# Altium PCB One_Layer_Driver_ PCB.PcbDoc
Units mil, origin at the board's own origin, x right, y up, seen from the top; angles counter-clockwise.
Board outline 3937.01 x 2519.67 mil, 2 copper layers (Top Layer, Bottom Side); 57 components, 41 nets, 147 pads, 30 vias.
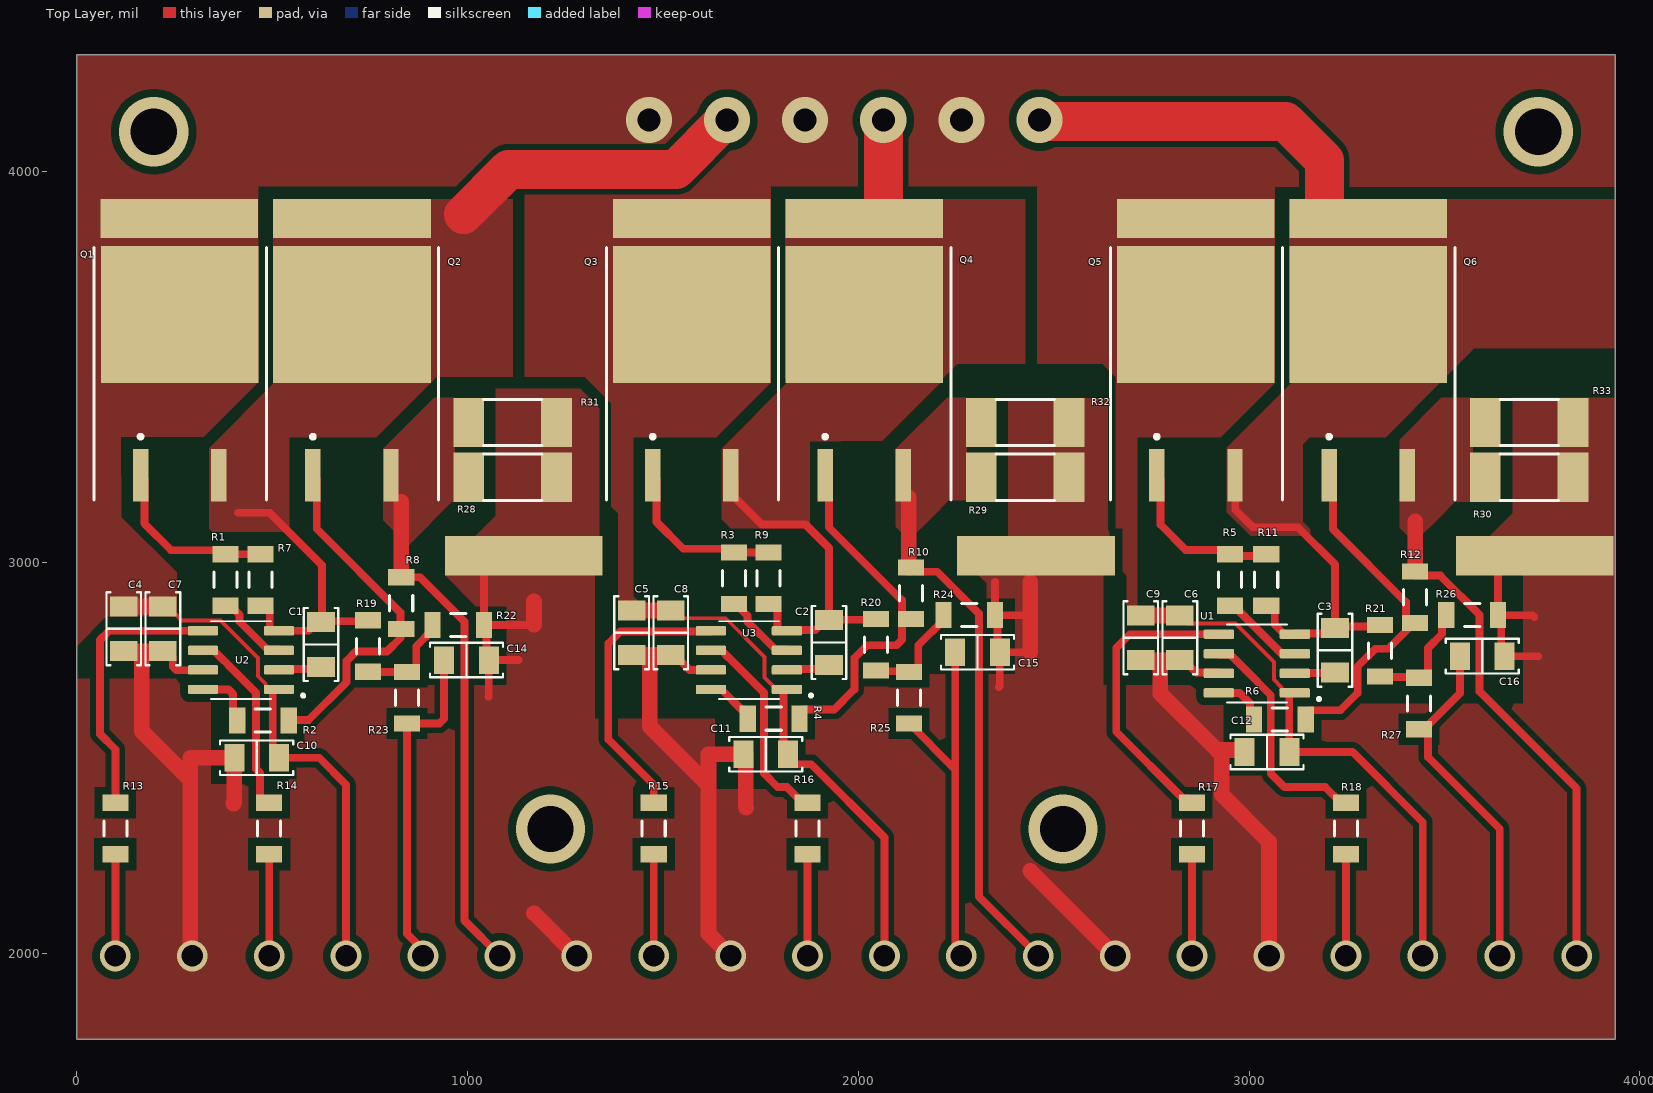
[diagram p0: Top Layer view]
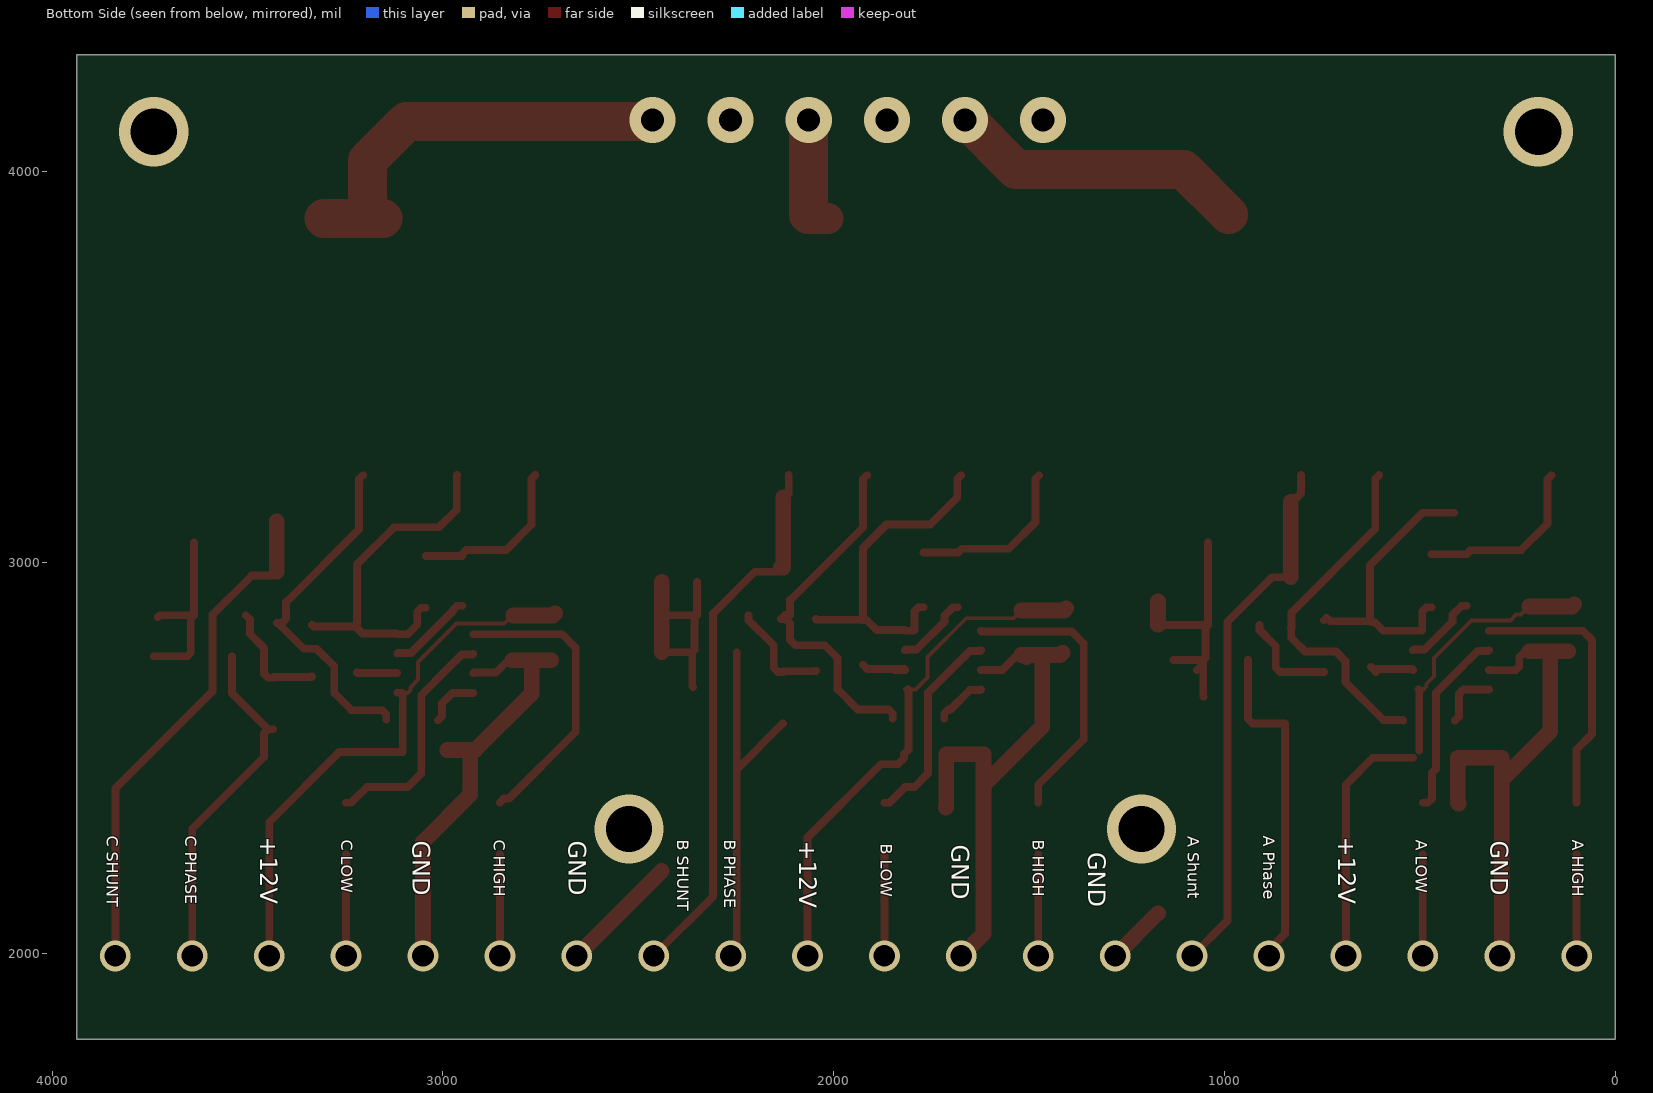
[diagram p1: Bottom Side view, seen from below]
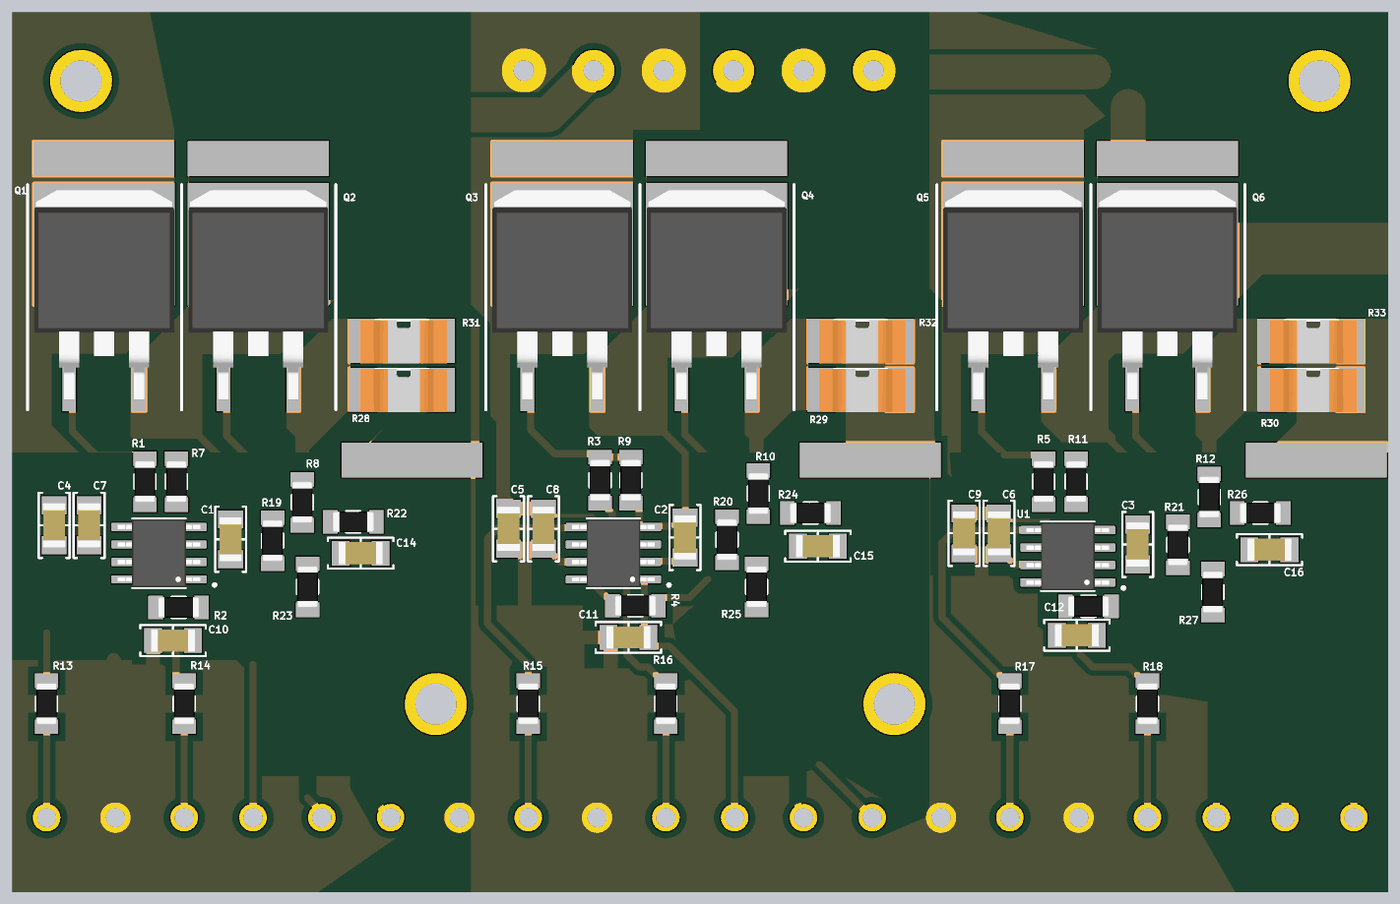
[diagram p2: 3D render of the assembled board from above, using the file's embedded part models]

## Layer stack, top to bottom
Top Solder: solder mask 0.4, Solder Resist, Dk 3.5
Top Layer: signal copper 1.378
Dielectric 1: dielectric 12.6, FR-4, Dk 4.8
Bottom Side: signal copper (thickness not stored)

## Board outline
0,1779.33 0,4299 3937.01,4299 3937.01,1779.33

## Design rules (kind name [scope] priority, off if disabled: settings)
AssemblyTestpoint [All] p1: testpointundercomponent=TRUE minsize=40 maxsize=120 preferedsize=60 minholesize=0 maxholesize=120 preferedholesize=32 testpointgrid=1 usegrid=TRUE gridtolerance=0.01 allowsidetop=TRUE allowsidebottom=TRUE
Clearance [All] p1: gap=10 ignorepadtopadclearanceinfootprint=FALSE except(3: Arc-Text Track-Text SMDPad-Text THPad-Text Via-Text Fill-Text Region-Text Text-Text Text-Hole; 15: Track-Poly; 20: Arc-Poly SMDPad-Poly THPad-Poly Via-Poly Fill-Poly Poly-Poly Poly-Region Poly-Text Poly-Hole)
DiffPairsRouting [All] p1: maxlimit=10 minlimit=10 mostfreqgap=10 substack1={77332796-445B-4B3C-BE02-87E5A48E286C} toplayer_{77332796-445b-4b3c-be02-87e5a48e286c}_minwidth=15 toplayer_{77332796-445b-4b3c-be02-87e5a48e286c}_maxwidth=15 toplayer_{77332796-445b-4b3c-be02-87e5a48e286c}_prefwidth=15 bottomlayer_{77332796-445b-4b3c-be02-87e5a48e286c}_minwidth=15 bottomlayer_{77332796-445b-4b3c-be02-87e5a48e286c}_maxwidth=15 bottomlayer_{77332796-445b-4b3c-be02-87e5a48e286c}_prefwidth=15 toplayer_minwidth=15 toplayer_maxwidth=15 toplayer_prefwidth=15 bottomlayer_minwidth=15 bottomlayer_maxwidth=15 bottomlayer_prefwidth=15 maxuncoupledlength=500
HoleSize [All] p1: absolutevalues=TRUE maxlimit=200 minlimit=1 maxpercent=80.000 minpercent=20.000
PlaneConnect [All] p1: pad.planeconnectstyle=Direct pad.reliefexpansion=20 pad.reliefentries=4 pad.reliefconductorwidth=10 pad.reliefairgap=10 via.planeconnectstyle=Relief via.reliefexpansion=20 via.reliefentries=4 via.reliefconductorwidth=10 via.reliefairgap=10
PolygonConnect [All] p1: connectstyle=Direct reliefconductorwidth=10 reliefentries=4 polygonreliefangle="90 Angle" airgapwidth=10
PolygonConnect PolygonConnect_1 [All] p2: connectstyle=Relief reliefconductorwidth=10 reliefentries=4 polygonreliefangle="90 Angle" airgapwidth=10
RoutingTopology [All] p1: topology=Daisy_Balanced
RoutingVias [All] p1: holewidth=40 width=60 viastyle="Through Hole" minholewidth=28 minwidth=50 maxholewidth=40 maxwidth=80
SilkToSilkClearance [All] p1: silktosilkclearance=3
SolderMaskExpansion [All] p1: expansion=4 istentingtop=FALSE
SupplyNets "Schematic Supply Nets_3" [InNet('+12V')] p1: voltage=0.000
SupplyNets "Schematic Supply Nets" [InNet('GND')] p2: voltage=0.000
UnRoutedNet UnRoutedNet_1 [(InNet('+12V') OR InNet('GND'))] p1 off:
UnRoutedNet [All] p2 off:
Width [All] p1: maxlimit=150 minlimit=15 preferedwidth=20 substack1={77332796-445B-4B3C-BE02-87E5A48E286C} toplayer_{77332796-445b-4b3c-be02-87e5a48e286c}_minwidth=10 toplayer_{77332796-445b-4b3c-be02-87e5a48e286c}_maxwidth=200 bottomlayer_{77332796-445b-4b3c-be02-87e5a48e286c}_minwidth=10 bottomlayer_{77332796-445b-4b3c-be02-87e5a48e286c}_maxwidth=10 bottomlayer_{77332796-445b-4b3c-be02-87e5a48e286c}_prefwidth=10 minimp=50.000000 maximp=50.000000 favimp=50.000000
23 further rules are at their usual default settings.

## Components (designator, comment, footprint, x,y, rotation, side; value= is the part's Value field where it differs from the comment)
C1 "0.1uF" "CAP 1206/3216" 625,2790 r270 top
C2 "0.1uF" "CAP 1206/3216" 1925,2795 r270 top
C3 "0.1uF" "CAP 1206/3216" 3220,2775 r270 top
C4 "10uF" "CAP 1206/3216" 120,2830 r270 top
C5 "10uF" "CAP 1206/3216" 1420,2820 r270 top
C6 "10uF" "CAP 1206/3216" 2823,2807.09 r270 top
C7 "1uF" "CAP 1206/3216" 220,2830 r270 top
C8 "1uF" "CAP 1206/3216" 1520,2820 r270 top
C9 "1uF" "CAP 1206/3216" 2723,2807.09 r270 top
C10 "1uF" "CAP 1206/3216" 460,2500 r180 top
C11 "1uF" "CAP 1206/3216" 1763.09,2509 r180 top
C12 "1uF" "CAP 1206/3216" 3046,2515 r180 top
C14 "4.7nF" "CAP 1206/3216" 997.09,2750 r0 top
C15 "4.7nF" "CAP 1206/3216" 2305,2770 r0 top
C16 "4.7nF" "CAP 1206/3216" 3597.09,2760 r0 top
Q1 "SQM70060EL" TO-263 263,3429 r0 top value=IRF4905S
Q2 "SQM70060EL" TO-263 704,3429 r0 top value=IRF4905S
Q3 "SQM70060EL" TO-263 1574,3429 r0 top value=IRF4905S
Q4 "SQM70060EL" TO-263 2015,3429 r0 top value=IRF4905S
Q5 "SQM70060EL" TO-263 2864,3429 r0 top value=IRF4905S
Q6 "SQM70060EL" TO-263 3305,3429 r0 top value=IRF4905S
R1 "36R" "RES 1206 (3216X08L)" 380,2904 r90 top
R2 "36R" "RES 1206 (3216X08L)" 425.11,2595 r0 top
R3 "36R" "RES 1206 (3216X08L)" 1682,2908 r90 top
R4 "36R" "RES 1206 (3216X08L)" 1732,2600 r0 top
R5 "36R" "RES 1206 (3216X08L)" 2951,2904 r90 top
R6 "36R" "RES 1206 (3216X08L)" 3028,2598 r0 top
R7 "10k" "RES 1206 (3216X08L)" 470,2904 r90 top
R8 "10k" "RES 1206 (3216X08L)" 830,2947.05 r270 top
R9 "10k" "RES 1206 (3216X08L)" 1770,2908 r90 top
R10 "10k" "RES 1206 (3216X08L)" 2135,2972.05 r270 top
R11 "10k" "RES 1206 (3216X08L)" 3044,2904 r90 top
R12 "10k" "RES 1206 (3216X08L)" 3425,2962.05 r270 top
R13 "36R" "RES 1206 (3216X08L)" 98.43,2370.08 r270 top
R14 "36R" "RES 1206 (3216X08L)" 492.13,2370.08 r270 top
R15 "36R" "RES 1206 (3216X08L)" 1476.38,2370.08 r270 top
R16 "36R" "RES 1206 (3216X08L)" 1870.08,2370.08 r270 top
R17 "36R" "RES 1206 (3216X08L)" 2854.33,2370.08 r270 top
R18 "36R" "RES 1206 (3216X08L)" 3248.03,2370.08 r270 top
R19 "100k" "RES 1206 (3216X08L)" 745,2837.05 r270 top
R20 "100k" "RES 1206 (3216X08L)" 2045,2840 r270 top
R21 "100k" "RES 1206 (3216X08L)" 3335,2825 r270 top
R22 "10k" "RES 1206 (3216X08L)" 1027.05,2840 r180 top
R23 "1k" "RES 1206 (3216X08L)" 845,2705 r270 top
R24 "10k" "RES 1206 (3216X08L)" 2335,2865 r180 top
R25 "1k" "RES 1206 (3216X08L)" 2130,2705 r270 top
R26 "10k" "RES 1206 (3216X08L)" 3622.05,2865 r180 top
R27 "1k" "RES 1206 (3216X08L)" 3435,2690 r270 top
R28 "10mR 2512 2.5W" Shunt_2512 1115.2,3218 r180 top
R29 "10mR 2512 2.5W" Shunt_2512 2427,3218 r180 top
R30 "10mR 2512 2.5W" Shunt_2512 3717,3218 r180 top
R31 "10mR 2512 2.5W" Shunt_2512 1115.2,3358 r180 top
R32 "10mR 2512 2.5W" Shunt_2512 2427,3358 r180 top
R33 "10mR 2512 2.5W" Shunt_2512 3717,3358 r180 top
U1 "UCC27201ADR" SOIC127P599X175-8N 3020,2741.21 r180 top
U2 "UCC27201ADR" SOIC127P599X175-8N 420,2750 r180 top
U3 "UCC27201ADR" SOIC127P599X175-8N 1720,2750 r180 top

## Footprints (in the part's own frame and the unit in brackets; to place one, negate y for a bottom-side part, rotate by r counter-clockwise, add the part's x,y. Pads: shape width x height; smd on the part's side, far side on the other; paste and mask are expansions set on the pad)
"CAP 1206/3216" [mm] "Chip Capacitor, 2-Leads, Body 3.25x1.60mm, IPC Medium Density"
  rect 1.3x1.8 smd: 1(-1.45,0) 2(1.45,0)
  silkscreen extent -2.37,-1.13 2.37,1.13, body extent -1.6,-0.81 1.6,0.81, height 1.62
"RES 1206 (3216X08L)" [mm] "Chip Resistor, 2-Leads, Body 3.2x1.6mm, IPC High Density _ (0.125 W)"
  rect 1.05x1.7 smd: 1(-0.377,0) 2(2.973,0)
  silkscreen extent 0.8,-0.75 1.8,0.75, body extent -0.23,-0.76 2.82,0.76, height 0.6
Shunt_2512 [mm] "Chip Resistor, 2-Leads, Body 6.3x3.1mm, IPC High Density _ (0.500 W)"
  rect 2x3.2 smd: 1(-2.85,0) 2(2.85,0)
  silkscreen extent -1.9,-1.5 1.9,1.5, body extent -3.28,-1.52 3.02,1.63, height 1.12
SOIC127P599X175-8N [mm]
  rrect25% 1.97x0.6 smd paste+0 mask+0.102: 1(-2.47,1.905) 2(-2.47,0.635) 3(-2.47,-0.635) 4(-2.47,-1.905) 5(2.47,-1.905) 6(2.47,-0.635) 7(2.47,0.635) 8(2.47,1.905)
  silkscreen extent -4.14,-2.53 1.95,2.53, body extent -3,-2.45 3,2.45, height 1.75
TO-263 [mm] "L7800CD2T _ D2-PAK/TO-263-AB; 3 Leads (1 Cropped); Body 15.9 (inc. leads) x 10.4 mm (LxW max)"
  rect 1x3.4 smd: 1(-2.54,-5.225) 3(2.54,-5.225)
  rect 10.25x8.9 smd: 4(0,5.225)
  silkscreen extent -5.56,-6.83 5.64,9.57, body extent -5.08,-6.11 5.08,9.16, height 4.88

## Part data
C1 C2 C3 C4 C5 C6 C7 C8 C9 C10 C11 C12 C14 C15 C16: library part Cap_Multi_SMD, "Bipolar ceramic capacitor SMD", Package=Package?, Rating=50V, Type=Type?, Validation=Valid, Inflow=inflow?
Q1 Q2 Q3 Q4 Q5 Q6: library part Semi_MOSFET_IRF4905S, "P-Channel MOSFET", Package=TO-263, Rating=Rating?, Type=P-Channel, Validation=Valid
  Q1 Q2 Q3 Q4 Q5: SQM70060EL=SQM70060EL
  Q6: Inflow=SQM70060EL
R1 R2 R3 R4 R5 R6 R7 R8 R9 R10 R11 R12 R13 R14 R15 R16 R17 R18 R19 R20 R21 R22 R23 R24 R25 R26 R27: library part Res_SMD_1206, "Resistor", Package=1206, Rating=0.25W, Type=10%, Validation=Valid, Inflow=inflow?
R28 R29 R30 R31 R32 R33: library part Res_Shunt_SMD, "Resistor", Package=Package?, Rating=Precision, Type=Shunt, Validation=NT, Inflow=inflow?
U1 U2 U3: "3-A, 120-V half bridge gate driver with 8-V UVLO and negative voltage handling", Package="SOIC-8 Texas Instruments", Check_prices=https://www.snapeda.com/parts/UCC27201ADR/Texas+Instruments/view-part/?ref=eda, MF="Texas Instruments", MP=UCC27201ADR, SnapEDA_Link=https://www.snapeda.com/parts/UCC27201ADR/Texas+Instruments/view-part/?ref=snap

## Free pads (board coordinates)
  rect 403.54x100 smd: 3(3731,3017) 5(262,3880) 5(704,3880) 5(1144,3017) 5(1574,3880) 5(2015,3880) 5(2455,3017) 5(2864,3880) 5(3305,3880)

## Via types
v1: diameter 78.74, hole 55.12, Top Layer to Bottom Side, 20 vias
v2: diameter 118.11, hole 59.06, Top Layer to Bottom Side, 6 vias
v3: diameter 177.17, hole 118.11, Top Layer to Bottom Side, 4 vias

## Nets (pads, with @x,y where several pads share a name; then routed paths per layer and width w, separated by ;. In a path a pad name is that pad's centre, name@x,y a point inside that pad or via, vN(x,y) a via of type N, cw(c..) or ccw(c..) an arc to the next point about the centre after c; other vN are vias at no path point)
+12V: C4.1 C5.1 C6.1 C7.1 C8.1 C9.1 C10.1 C11.1 C12.1 pad.5@262,3880 pad.5@1574,3880 pad.5@2864,3880 Q1.4 Q3.4 Q5.4 U1.1 U2.1 U3.1 | length 4086
  Top Layer w10: C7.1 240.59,2866.5 253.32,2866.5 268.01,2851.81 367.19,2851.81 463.46,2755.54 463.46,2708.71 483.46,2688.71 483.46,2681.81 490.28,2675 U2.1@503.3,2675 ; C8.1 1540.09,2857 1660.83,2857 1760,2757.83 1760,2705.28 1790.28,2675 1810.19,2675 U3.1 ; C6.1 2843.17,2844 2965.04,2844 3063.46,2745.58 3063.46,2699.92 3083.46,2679.92 3083.46,2673.02 3090.28,2666.21 U1.1@3103.09,2666.21
  Top Layer w20: C10.1@501.5,2518.5 501.5,2537.14 501.49,2673.19 U2.1@503.3,2675 ; C10.1 620,2500 688.98,2431.02 v1(688.98,1992.91) ; U3.1@1810.19,2675 1808.38,2673.19 1808.38,2520.79 C11.1 1820.17,2499.16 1835.76,2483.57 1879.43,2483.57 2066.93,2296.07 v1(2066.93,1992.91) ; U1.1 3104.9,2666.21 3103.09,2664.4 C12.1 3265,2515 3444.88,2335.12 v1(3444.88,1992.91)
  Top Layer w40: C4.1@104.57,2892.68 110.16,2887.09 C4.1 C7.1 ; C5.1@1404.57,2882.68 1410.16,2877.09 C5.1 C8.1 ; C9.1@2713.16,2869.76 2718.75,2864.17 C9.1 C6.1@2820,2864.17
  other v2: 1464,4132 1864,4132 2264,4132
"A HIGH": R13.1 U2.5 | length 706.2
  Top Layer w20: R13.1 98.43,2521.57 59,2561 59,2801.22 82.78,2825 U2.5
"A LOW": R14.1 U2.6 | length 483.6
  Top Layer w20: U2.6 324.57,2773.19 351.54,2773.19 367.91,2756.81 368.09,2756.81 389.72,2735.18 389.72,2735 458.46,2666.26 458.46,2471.54 468.66,2461.34 468.66,2395.59 479.33,2384.92 R14.1
"A SHUNT": Q2.3 R8.1 R28.2 R31.2 | length 1377
  Top Layer w20: Q2.3@804,3223.58 Q2.3 804,3176.05 813.69,3166.36 818.28,3166.36 830,3154.65 ; R8.1 878.11,2961.89 992,2848 992,2083.59 v1(1082.68,1992.91)
  Top Layer w40: R8.1 830,3154.65
"B HIGH": R15.1 U3.5 | length 731.8
  Top Layer w20: R15.1 1476.38,2430.62 1360,2547 1360,2792.22 1390.97,2823.19 1620.94,2823.19 U3.5
"B LOW": R16.1 U3.6 | length 529.8
  Top Layer w20: U3.6 1624.57,2773.19 1651.54,2773.19 1667.91,2756.81 1668.09,2756.81 1758.46,2666.44 1758.46,2460.07 1793.61,2424.92 1817.28,2424.92 1857.28,2384.92 R16.1
"B SHUNT": Q4.3 R10.1 R29.2 R32.2 | length 1411.2
  Top Layer w20: Q4.3@2115,3223.58 Q4.3 2115,3176.34 Q4.3@2129,3166.18 ; R10.1 2145.67,2976.22 2201.78,2976.22 2309,2869 2309,2144.54 v1(2460.63,1992.91)
  Top Layer w40: Q4.3@2129,3166.18 2129,2987.56 2129.67,2986.89 R10.1
"C HIGH": R17.1 U1.5 | length 761.4
  Top Layer w20: R17.1 2843.66,2395.59 2830.87,2395.59 2660,2566.46 2660,2780.94 2695.15,2816.08 2922.63,2816.08 U1.5
"C LOW": R18.1 U1.6 | length 600.7
  Top Layer w20: U1.6 2924.57,2764.4 2951.54,2764.4 2967.91,2748.02 2968.09,2748.02 2989.72,2726.39 2989.72,2726.21 3055.83,2660.11 3055.83,2459.75 3090.66,2424.91 3195.24,2424.91 3235.24,2384.92 R18.1
"C SHUNT": Q6.3 R12.1 R30.2 R33.2 | length 1315.3
  Top Layer w20: R12.1 3435.67,2966.22 3489.78,2966.22 3590,2866 3590,2670 3838.58,2421.42 v1(3838.58,1992.91)
  Top Layer w40: R12.1 3425,3105.22
GND: C4.2 C5.2 C6.2 C7.2 C8.2 C9.2 C10.2 C11.2 C12.2 C14.2 C15.2 C16.2 pad.3 pad.5@1144,3017 pad.5@2455,3017 R22.1 R24.1 R26.1 R28.1 R29.1 R30.1 R31.1 R32.1 R33.1 U1.7 U2.7 U3.7 | length 6160.3
  Top Layer w20: C7.2 229.84,2772.91 245.43,2757.32 245.43,2733.71 255.15,2724 321.76,2724 U2.7 ; pad.5@1041.89,3051 R22.1 ; 1053,2656 1054.17,2657.17 C14.2@1054.17,2740.16 ; C14.2@1069.76,2724.57 C14.2@1054.17,2740.16 ; 1130,2750 C14.2 ; 1170,2840 R22.1 ; C8.2@1529.84,2762.91 1567.76,2725 U3.7 ; 2350,2950 2349.84,2949.84 R24.1 ; 2360,2681 2362.09,2683.09 C15.2 ; 2440,2770 C15.2 ; 2440,2870 2435,2865 R24.1 ; C6.2 2832.84,2750 2864.82,2718.02 2920.95,2718.02 U1.7 ; C12.2 C12.2@2988.91,2519.92 ; pad.3@3636.89,3051 R26.1 ; 3730,2860 3725,2865 R26.1 ; 3740,2760 C16.2 3645.53,2768.64 3645.53,2856.36 R26.1 ; R22.1 1048.03,2833.86 1048.03,2756.14 C14.2 ; C14.2@1054.17,2740.16 C14.2 ; R24.1 2355.96,2858.88 2355.96,2776.12 C15.2
  Top Layer w40: C4.2 166.09,2772.91 ; C7.2 166.09,2772.91 ; v1(295.28,1992.91) 290,1998.19 290,2444 ; 401,2383 402.91,2384.91 C10.2 290,2500 290,2444 ; 1170,2102.44 v1(1279.53,1992.91) ; 1170,2840 1170,2900 ; C5.2@1414.41,2768.5 C5.2 1466.55,2762.91 ; C8.2@1507.5,2757.32 C8.2@1513.09,2762.91 ; C8.2 C8.2@1513.09,2762.91 ; v1(1673.23,1992.91) 1616.57,2049.57 1616.57,2429.48 ; 1713,2372 1711.91,2373.09 1711.91,2509 C11.2 1616.57,2509 1616.57,2429.48 ; 2440,2210.39 v1(2657.48,1992.91) ; 2440,2770 2440,2870 2440,2950 ; C9.2 2773,2750 ; C6.2 2773,2750 ; C12.2@2988.91,2519.92 2930,2519.92 ; v1(3051.18,1992.91) 3051.18,2284.63 2930,2405.81 2930,2519.92 ; 166.09,2772.91 166.09,2567.91 290,2444 ; 1466.55,2762.91 1466.55,2579.5 1616.57,2429.48 ; 1466.55,2762.91 C8.2@1513.09,2762.91 ; 2773,2750 2773,2664.64 2917.72,2519.92 2930,2519.92
NetC1_2: C1.2 U2.2 | length 148.2
  Top Layer w20: U2.2 U2.2@519.05,2726.81 ; U2.2@546.2,2726.81 U2.2@519.06,2726.81 ; C1.2@611.81,2719.72 C1.2@618.9,2726.81 ; C1.2 C1.2@618.9,2726.81 ; U2.2@519.05,2726.81 C1.2@618.9,2726.81
NetC2_2: C2.2 U3.2 | length 140.1
  Top Layer w20: U3.2@1844.21,2725 U3.2 1819.06,2726.81 1913.9,2726.81 C2.2
NetC3_2: C3.2 U1.2 | length 130.4
  Top Layer w20: U1.2@3144.21,2716.21 U1.2 3118.09,2717.06 3219.15,2717.06 C3.2
NetC14_1: C14.1 R23.2 | length 861.9
  Top Layer w20: v1(885.83,1992.91) 885.83,2008.81 845,2049.64 R23.2 927.95,2587.95 940,2600 C14.1
NetC15_1: C15.1 R25.2 | length 953.7
  Top Layer w20: R25.2 2244.41,2473.54 ; v1@2247.91,1994 C15.1 ; v1@2252.54,2004.15 v1(2263.78,1992.91)
NetC16_1: C16.1 R27.2 | length 898.4
  Top Layer w20: R27.2 R27.2@3447.8,2572.95 ; C16.1 3540,2665.16 R27.2@3447.8,2572.95 ; v1(3641.73,1992.91) 3641.73,2318.27 3458.46,2501.54 3458.46,2562.28 R27.2@3447.8,2572.95
NetJ3_5: R18.2 | length 260.1
  Top Layer w20: v1(3248.03,1992.91) R18.2
NetJ3_6: R17.2 | length 260.1
  Top Layer w20: v1(2854.33,1992.91) R17.2
NetJ3_11: R16.2 | length 260.1
  Top Layer w20: v1(1870.08,1992.91) R16.2
NetJ3_12: R15.2 | length 260.1
  Top Layer w20: v1(1476.38,1992.91) R15.2
NetJ3_17: R14.2 | length 260.1
  Top Layer w20: v1(492.13,1992.91) R14.2
NetJ3_18: R13.2 | length 260.1
  Top Layer w20: v1(98.43,1992.91) R13.2
NetQ1_1: Q1.1 R1.2 R7.2 | length 457.6
  Top Layer w20: Q1.1 172.69,3213.61 172.69,3099.46 241.15,3031 370.05,3031 R1.2 R7.2
NetQ2_1: Q2.1 R2.2 R8.2 | length 916.6
  Top Layer w20: R2.2 544.16,2597 593.3,2597 690,2693.7 690,2747.42 714.58,2772 793.85,2772 829,2807.15 829,2829 R8.2 828,2832 828,2872 613.69,3086.31 613.69,3213.9 Q2.1@604,3223.58
NetQ3_1: Q3.1 R3.2 R9.2 | length 442.7
  Top Layer w20: Q3.1 1483.69,3213.61 1483.69,3103.31 1552,3035 1672.05,3035 R3.2 R9.2
NetQ4_1: Q4.1 R4.2 R10.2 | length 937.6
  Top Layer w20: R4.2 1849.05,2612.8 1859.72,2623.46 1938.46,2623.46 1990,2675 1990,2755 2022.9,2787.9 2097.9,2787.9 2112,2802 2112,2844.33 2122.67,2855 R10.2 2124.33,2865.67 2111.54,2865.67 2111.54,2903.46 1924.69,3090.31 1924.69,3213.61 Q4.1
NetQ5_1: Q5.1 R5.2 R11.2 | length 432.3
  Top Layer w20: Q5.1@2764,3223.58 2773.69,3213.9 2773.69,3096.31 2838.28,3031.72 2940.33,3031.72 R5.2 ; R5.2@2951,3016.55 R11.2@3043.5,3016.55
NetQ6_1: Q6.1 R6.2 R12.2 | length 891.5
  Top Layer w20: R6.2 3145.05,2610.8 3155.72,2621.46 3233.91,2621.46 3278.48,2666.04 3278.48,2733.86 3323.54,2778.91 3356.48,2778.91 R12.2@3413.79,2836.21 ; Q6.1 3214.68,3213.61 3214.68,3085.32 3401.54,2898.46 3401.54,2855.67 3412.2,2845 R12.2
NetR1_1: R1.1 U2.3 | length 194.4
  Top Layer w20: R1.1 392.8,2889.16 416.54,2865.42 416.54,2848.56 488.29,2776.81 515.43,2776.81 U2.3
NetR2_1: R2.1 U2.8 | length 154.4
  Top Layer w20: U2.8 387.88,2675 399.6,2663.28 399.6,2605.67 R2.1
NetR3_1: R3.1 U3.3 | length 188.7
  Top Layer w20: R3.1@1682.86,2885.09 1694.86,2885.09 1716.54,2863.42 1716.54,2848.56 1788.29,2776.81 1815.43,2776.81 U3.3
NetR4_1: R4.1 U3.8 | length 133
  Top Layer w20: U3.8 1624.57,2673.19 1651.54,2673.19 1701.26,2623.46 1706.49,2623.46 1717.16,2612.8 R4.1
NetR5_1: R5.1 U1.3 | length 218.9
  Top Layer w20: R5.1 2963.8,2889.16 2974.46,2878.49 2974.46,2875.54 3081.98,2768.02 3115.43,2768.02 U1.3
NetR6_1: R6.1 U1.8 | length 138.7
  Top Layer w20: U1.8 2922.97,2666 2976,2666 3002.49,2639.51 3002.49,2606.67 R6.1@3013.16,2596
NetR19_2: R19.2 R22.2 R23.1 | length 254.6
  Top Layer w20: R19.2 745.08,2719.92 844.92,2719.92 R23.1 857.8,2719.84 868.46,2730.51 868.46,2785.67 910,2827.2 R22.2
NetR20_2: R20.2 R24.2 R25.1 | length 275.4
  Top Layer w20: R20.2 2046.56,2721.4 2128.44,2721.4 R25.1 2142.8,2719.84 2153.46,2730.51 2153.46,2787.72 2217.95,2852.2 R24.2
NetR21_2: R21.2 R26.2 R27.1 | length 297.7
  Top Layer w20: R21.2 3336.56,2706.4 3433.44,2706.4 R27.1 3447.33,2704.84 3458,2715.51 3458,2781 3494.33,2817.33 3494.33,2854.33 R26.2
"PHASE A": C1.1 pad.5@704,3880 Q1.3 Q2.4 R7.1 R19.1 U2.4 | length 1531.8
  Top Layer w20: 412.62,3127 493,3127 627.4,2992.6 627.4,2849.49 729.26,2849.49 738.33,2858.56 R19.1 ; R7.1@470,2885.16 482.8,2885.16 493.46,2874.49 493.46,2826.81 495.28,2825 U2.4 593.07,2825 615.16,2847.09 C1.1 ; R19.1@733.62,2853.46 R19.1@735,2854.84
  Top Layer w100: 989.02,3890.02 1105,4006 1533.1,4006 1659.1,4132 v2(1664,4132)
"PHASE B": C2.1 pad.5@2015,3880 Q3.3 Q4.4 R9.1 R20.1 U3.4 | length 1176.1
  Top Layer w20: Q3.3 1683.69,3213.61 1683.69,3166.36 1753.05,3097 1865,3097 1925,3037 C2.1 ; R9.1@1770,2885.16 1782.8,2885.16 1793.46,2874.49 1793.46,2826.81 1795.28,2825 U3.4 1819.06,2826.81 1889.88,2826.81 1915.16,2852.09 C2.1 ; R20.1 2043.62,2853.46 1926.38,2853.46 C2.1
  Top Layer w80: pad.5@2015,3880 2054,3880 pad.5@2064,3890
  Top Layer w100: pad.5@2064,3890 v2(2064,4132)
"PHASE C": C3.1 pad.5@3305,3880 Q5.3 Q6.4 R11.1 R21.1 U1.4 | length 1985.5
  Top Layer w20: Q5.3@2964,3223.58 2965,3222.58 2965,3135 3010,3090 3125,3090 3220,2995 C3.1 ; R11.1@3044,2884.16 3055.33,2884.16 3066,2873.49 3066,2840.49 3090.28,2816.21 U1.4 3119.05,2818.02 3205.94,2818.02 C3.1 ; R21.1 3331.12,2835.96 3223.88,2835.96 C3.1
  Top Layer w100: v2(2464,4132) 2467.47,4128.53 3093.26,4128.53 3193.09,4028.71 pad.5@3193.09,3880 ; pad.5@3153.23,3880 pad.5@3193.09,3880 ; pad.5@3305,3880 pad.5@3193.09,3880
copper on no net:
  other v3: 1212,2318 2524,2318 196.85,4102.17 3740.16,4102.17

## Polygon pours and split planes (outlines as drawn)
GND on Top Layer "NONET_L-01_P-001" (solid, pour order 54): 0,2702 342,2702 342,2432 535,2432 535,2685 1100,2685 1100,3060 1326,3060 1326,2600 1633,2600 1633,2420 1818,2420 1818,2714 2401.9,2714 2401.9,3038 2627,3038 2627,2685 2934,2685 2934,2454 3123,2454 3123,2637.99 3633,2637.99 3702.24,2637.99 3702.24,3110 3936.71,3110 3936.71,1779.33 0,1779.33
"PHASE A" on Top Layer "PHASE_A_L01_P037" (solid, pour order 37): 544,3320.29 544,3078 346.53,3078 338.32,3086.22 338.32,3292.32 508,3462 908.1,3462 766.39,3320.29
+12V on Top Layer "+12V_L01_P043" (solid, pour order 43): 0,4299 0,2786 75.78,2861.78 255.02,2862 255.02,2974.32 113.28,3116.06 112.89,3322 325,3322 463.78,3460.78 463.78,3963.38 1146.44,3963.38 1146.44,3917 1776,3917 1776,3962.3 2458,3963.38 2458,3922 3065.82,3922 3065.82,3960.94 3937.01,3960.94 3937.01,4299
GND on Top Layer "GND_L01_P052" (solid, pour order 52): 3675,3126 3675,3421 3937,3421 3937,3018 3790.01,3018.01 3785,3013 3785,2976 3634.5,2976 3580,2976 3580,3031
"PHASE B" on Top Layer "PHASE_B_L01_P038" (solid, pour order 38): 1891.03,3310.22 1875.2,3294.39 1875.2,3087 1733.56,3087 1673.32,3087 1650.32,3110 1650.32,3152.76 1650.32,3291.32 1825.97,3466.97 2216.77,3466.97 2060.02,3310.22
+12V on Top Layer "+12V_L01_P045" (solid, pour order 45): 1146.44,3930.01 1146.44,3475 1300.24,3475 1368,3407.24 1368,3143 1385,3126 1385,2879 1436,2902 1424.6,2913.4 1424.6,3320 1636.03,3320 1775.76,3459.72 1775.76,3930.01
+12V on Top Layer "+12V_L01_P047" (solid, pour order 47): 2458,3930.01 2458,3508 2625,3508 2659.14,3473.86 2659.14,2994.86 2687.62,2966.38 2687.62,2889.38 2714,2863 2714,3320 2927.5,3320 3065.78,3458.28 3065.78,3930.01
"PHASE A" on Top Layer "PHASE_A_L01_P044" (solid, pour order 44): 921,3475 907.51,3461.51 502.22,3460 502.22,3929.98 1116,3929.98 1116,3475
"PHASE B" on Top Layer "PHASE_B_L01_P046" (solid, pour order 46): 1813.25,3930 1813.25,3471.48 2216.69,3471.48 2253.2,3508 2427,3508 2427,3930
"PHASE C" on Top Layer "PHASE_C_L01_P048" (solid, pour order 48): 3103.23,3930 3103.23,3462 3105,3462 3490.95,3462 3576.95,3548 3937,3548 3937,3930.01
GND on Top Layer "GND_L01_P051" (solid, pour order 51): 2384,3067 2384,3420.03 2641.7,3419.97 2641.7,3141 2641.7,3041.03 2508.98,2908.31 2329,2908.31 2329,2947 2254,3022 2254,3067
"PHASE C" on Top Layer "PHASE_C_L01_P039" (solid, pour order 39): 3156,3321 3137.16,3302.16 3137.16,3104.72 3157,3084.88 3157,3068 3004,3068 2943.27,3128.73 2943.27,3293.27 3117,3467 3495.95,3467 3349.95,3321
"A SHUNT" on Top Layer "A_SHUNT_L01_P036" (solid, pour order 36): 915,3421 967.22,3421 967.22,3155 959.95,3155 848.89,3043.95 784.39,3108.44 784.39,3290.39
"C SHUNT" on Top Layer "C_SHUNT_L01_P050" (solid, pour order 50): 3385.35,3314.35 3492,3421 3573,3421 3573,3155 3526.95,3155 3489.26,3117.31 3422.97,3051.03 3385.35,3088.65 3385.35,3152
GND on Top Layer "GND_L01_P053" (solid, pour order 53): 1072,3120 1072,3444 1288,3444 1337,3395 1337,3028.26 1196.7,2887.96 1021.29,2887.96 942.21,2967.03 942.21,3067 1019,3067
"B SHUNT" on Top Layer "B_SHUNT_L01_P049" (solid, pour order 49): 2095.32,3290.48 2227.8,3422 2277,3422 2277,3159.04 2232,3159 2189,3116 2129.5,3056.5 2095.32,3090.68
"PHASE C" on Top Layer "PHASE_C_L01_P042" (solid, pour order 42): 3106,3871 3107,3870 3507,3870 3507,3756 3505,3754 3104,3754 3104,3871
"PHASE B" on Top Layer "PHASE_B_L01_P041" (solid, pour order 41): 1816,3871 1817,3870 2217,3870 2217,3756 2215,3754 1814,3754 1814,3871
"PHASE A" on Top Layer "PHASE_A_L01_P040" (solid, pour order 40): 505,3871 506,3870 906,3870 906,3756 904,3754 503,3754 503,3871

## Silkscreen, mask and mechanical layers (free items; w line width, h text height)
Bottom Overlay:
  text "A Phase" at 900,2300 h30 r90
  text "C PHASE" at 3660,2300 h30 r90
  text "C SHUNT" at 3860,2300 h30 r90
  text "A Shunt" at 1093.42,2299.45 h30 r90
  text "+12V" at 708,2298 h45 r90
  text "+12V" at 3468,2298 h45 r90
  text "A HIGH" at 110,2290 h30 r90
  text "A LOW" at 510,2290 h30 r90
  text "B HIGH" at 1490,2290 h30 r90
  text "B PHASE" at 2280,2290 h30 r90
  text "B SHUNT" at 2400,2290 h30 r90
  text "C HIGH" at 2870,2290 h30 r90
  text "C LOW" at 3260,2290 h30 r90
  text "GND" at 318,2288 h45 r90
  text "+12V" at 2088,2288 h45 r90
  text "GND" at 2678,2288 h45 r90
  text "GND" at 3078,2288 h45 r90
  text "B LOW" at 1880,2280 h30 r90
  text "GND" at 1698,2278 h45 r90
  text "GND" at 1348,2258 h45 r90